# Altium PCB PCB.PcbDoc (part 2 of 2)
Units mm, origin at the board's own origin, x right, y up, seen from the top; angles counter-clockwise.
Board outline 27 x 40 mm, 2 copper layers (Top Layer, Bottom Layer), stack 1.56 mm thick; 47 components, 32 nets, 150 pads, 52 vias.
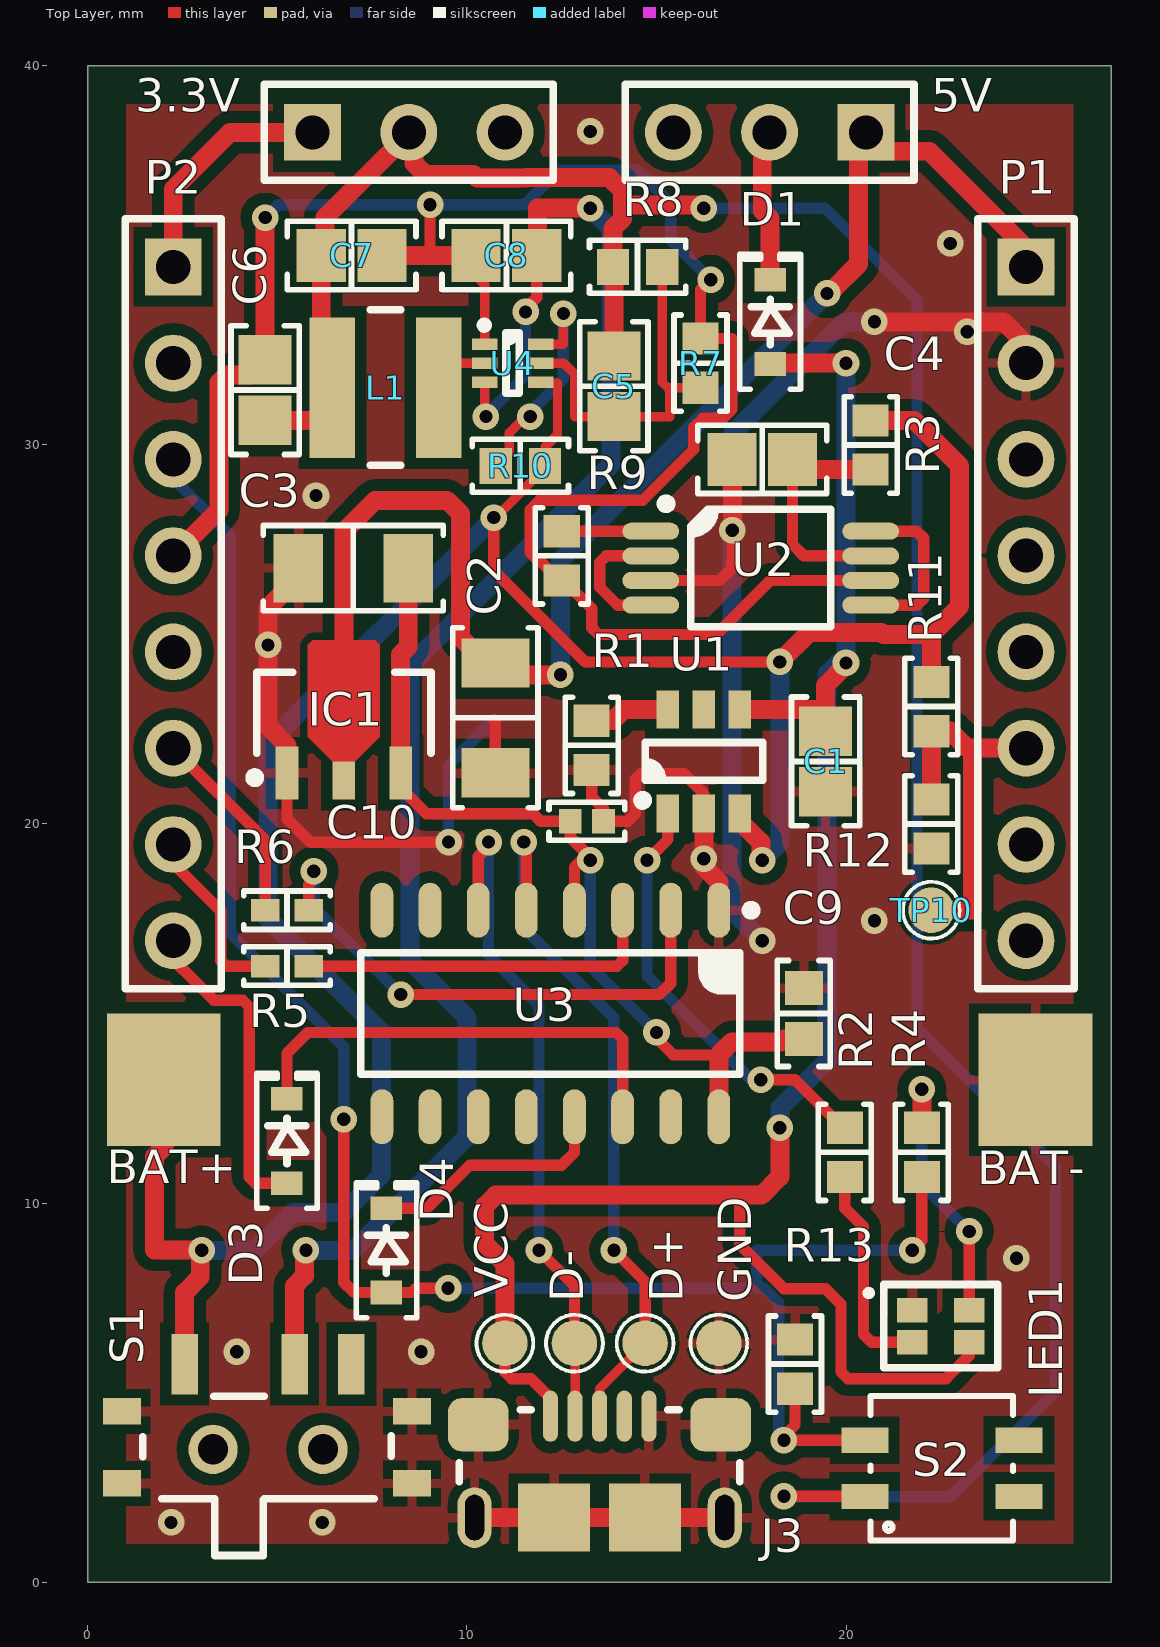
[diagram p0: Top Layer view]

## Via types
v1: diameter 0.7, hole 0.35, Top Layer to Bottom Layer, 52 vias

## Nets (pads, with @x,y where several pads share a name; then routed paths per layer and width w, separated by ;. In a path a pad name is that pad's centre, name@x,y a point inside that pad or via, vN(x,y) a via of type N, cw(c..) or ccw(c..) an arc to the next point about the centre after c; other vN are vias at no path point) (continued)
OUT-: (continued)
  Top Layer w0.3: 9.025,35 v1(9.025,36.338) ; v1(16.429,34.362) 16.162,34.096 R7.1 16.99,32.81 16.99,30.939 16.754,30.703 16.223,30.703 15.987,30.466 15.987,29.892 14.633,28.538 11.914,28.538 11.672,28.296 11.672,27.154 11.884,26.942 11.933,26.942 12.45,26.425 R9.1 12.55,26.425 13.29,25.685 13.29,25.176 13.466,25 16.575,25 18,26.425 U2.6
  Top Layer w0.5: P2.4 3.453,28.283 3.453,31.646 3.657,31.85 4.275,31.85 C6.1 v1(4.675,36) ; C7.1 9.025,35 C8.1
  Bottom Layer w0.3: v1(4.675,36) 5.013,36.338 v1(9.025,36.338) 11.517,36.338 12.429,37.25 14.5,37.25 15.375,36.375 15.375,35.416 v1(16.429,34.362)
OUT_3.3V: 3.3V.1 P2.1 | length 6.6
  Top Layer w0.5: P2.1@1.75,34.7 2.25,35.2 2.25,36.75 3.75,38.25 3.3V.1@5.96,38.25
OUT_5V: 5V.1 C2.2 IC1.2 P1.1 | length 40.4
  Top Layer w0.5: IC1.2 6.75,27.713 7.575,28.538 9.474,28.538 9.832,28.18 9.832,24.918 10.5,24.25 C2.2 11.064,23.936 v1(12.464,23.936) ; v1(19.5,34) 19.554,34 20.33,34.776 20.33,38.25 20.83,37.75 22.2,37.75 P1.1@25.25,34.7
  Bottom Layer w0.5: v1(12.464,23.936) 12.464,26.964 v1(19.5,34)
RST: D3.1 P2.8 | length 8.8
  Top Layer w0.3: P2.8@1.75,16.92 3.317,15.353 4.079,15.353 4.25,15.182 4.25,10.687 4.412,10.525 D3.1
RX: P2.6 R6.2 | length 5.6
  Top Layer w0.3: P2.6@1.75,22 P2.6@1.989,21.761 ; P2.6 4.675,19.575 R6.2
TX: P2.7 R5.2 | length 5
  Top Layer w0.3: P2.7@1.75,19.46 3.5,17.71 3.5,16.396 3.646,16.25 R5.2
pads on no net: 3.3V.3 5V.3 J3.4 P1.3 P1.4 P1.5 P1.7 P1.8 P2.2 P2.5 S1.3 S1.MH S2.2* S2.3* U1.5 U3.7 U3.8 U3.9 U3.10 U3.11 U3.12 U3.15

## Polygon pours and split planes (outlines as drawn)
GND on Bottom Layer "GND_L02_P001" (solid, remove dead copper, pour order 1): 0,0 27,0 27,40 0,40
GND on Top Layer "GND_L01_P002" (solid, remove dead copper, pour order 2): 0,0 27,0 27,40 0,40

## Silkscreen, mask and mechanical layers (free items; w line width, h text height)
Board outline:
  the board outline again, w0.2

## Dimensions
27,40 to 27,0 on Board outline
0,0 to 27,0 on Board outline